# EAGLE board Distribution_Board (EAGLE 9.7.0)
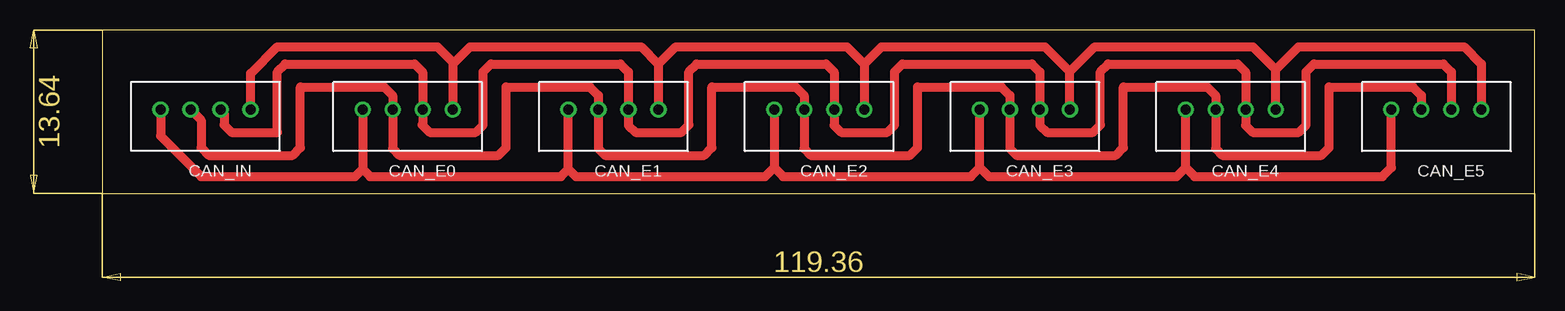
[diagram p0: board, top side]

Size 119.36 x 13.64 mm. Coordinates in mm from the lower left corner, seen from the top.
Outline: 0,0 119.36,0 119.36,13.64 0,13.64 0,0
Copper layers (1*16): Top / Bottom
Stack-up Default Layer Stack: Top User Defined 0.035mm / Dielectric-1 User Defined 1.5mm / Bottom User Defined 0.035mm
Design rules "default": minimum track width 6mil, minimum drill 0.35mm, track to track 6mil, track to pad 6mil, pad to pad 6mil, via to via 6mil, smd to smd 6mil, copper to edge 40mil, drill to drill 6mil, minimum pad ring 10mil, minimum via ring 8mil, stop-mask expansion 4mil, vias tented up to drill 0mil, thermal gap 10mil

## Footprints (pad centres in the part's own frame; a part is rotated, then mirrored left to right if it is on the bottom)
B4B-XH-A = drill 0.84: 1 0,0; 2 2.5,0; 3 5,0; 4 7.5,0

## Placement (x,y rotation side)
CAN_E0  3A/250V  [B4B-XH-A]  29.21,6.98 180 top
CAN_E1  3A/250V  [B4B-XH-A]  46.35,6.98 180 top
CAN_E2  3A/250V  [B4B-XH-A]  63.5,6.98 180 top
CAN_E3  3A/250V  [B4B-XH-A]  80.64,6.98 180 top
CAN_E4  3A/250V  [B4B-XH-A]  97.79,6.98 180 top
CAN_E5  3A/250V  [B4B-XH-A]  114.94,6.98 180 top
CAN_IN  3A/250V  [B4B-XH-A]  12.37,6.99 180 top

## Library data of the parts
CAN_E0 CAN_E1-CAN_E5 CAN_IN = Connector; CATEGORY: CONNECTOR; DSECRIPTION: 2.5mm pitch/disconnctable crimp style connector; MANUFACTURER: JST (XH connector); MPN: B4B-XH-A; OPERATING_TEMPERATURE: -25 C to 85 C; PART_STATUS: ACTIVE; ROHS_COMPLIANT: COMPLAINT; SERIES: B4B-XH-A; SUB_CATEGORY: Through hole; TYPE: TOP ENTRY

## Nets
N$1: CAN_E0.1 CAN_E1.1 CAN_E2.1 CAN_E3.1 CAN_E4.1 CAN_E5.1 CAN_IN.1
N$2: CAN_E0.2 CAN_E1.2 CAN_E2.2 CAN_E3.2 CAN_E4.2 CAN_E5.2 CAN_IN.2
N$3: CAN_E0.4 CAN_E1.4 CAN_E2.4 CAN_E3.4 CAN_E4.4 CAN_E5.4 CAN_IN.4
N$4: CAN_E0.3 CAN_E1.3 CAN_E2.3 CAN_E3.3 CAN_E4.3 CAN_E5.3 CAN_IN.3

## Tracks (layer width: path | path; a pad name or v marks a point on that pad's centre or on a via)
N$1
  Top 0.762: CAN_IN.1 12.37,10 14.61,12.24 27.94,12.24 29.21,10.97 | 29.21,10.97 CAN_E0.1 | 29.21,10.97 29.39,10.97 30.66,12.24 44.91,12.24 46.35,10.8 | 46.35,10.8 CAN_E1.1 | 63.5,10.8 CAN_E2.1 | CAN_E3.1 80.64,10.16 | CAN_E4.1 97.79,10.34 | CAN_E5.1 114.94,10.8 113.49,12.24 99.69,12.24 97.79,10.34 | 63.5,10.8 64.95,12.24 78.56,12.24 80.64,10.16 | 46.35,10.8 47.8,12.24 62.05,12.24 63.5,10.8 | 80.64,10.16 82.73,12.24 95.89,12.24 97.79,10.34
N$2
  Top 0.762: CAN_IN.2 10.16,6.7 10.16,5.72 10.79,5.08 14.61,5.08 14.61,10.16 15.24,10.8 26.04,10.8 26.71,10.12 CAN_E0.2 26.71,5.75 26.67,5.72 27.3,5.08 31.11,5.08 31.75,5.72 31.75,10.16 32.38,10.8 43.18,10.8 43.85,10.12 CAN_E1.2 43.85,5.67 44.45,5.08 48.26,5.08 48.9,5.72 48.9,10.16 49.53,10.8 60.33,10.8 61,10.12 CAN_E2.2 61,5.67 61.59,5.08 65.41,5.08 66.04,5.72 66.04,10.16 66.67,10.8 77.47,10.8 78.14,10.12 CAN_E3.2 78.14,5.67 78.74,5.08 82.55,5.08 83.19,5.72 83.19,10.16 83.82,10.8 94.61,10.8 95.29,10.12 CAN_E4.2 95.29,5.67 95.89,5.08 99.69,5.08 100.33,5.72 100.33,10.16 100.97,10.8 111.76,10.8 112.44,10.12 CAN_E5.2
N$3
  Top 0.762: CAN_IN.4 4.87,4.79 8.26,1.4 21.08,1.4 21.71,2.03 | CAN_E0.4 21.71,2.03 | 21.71,2.03 22.34,1.4 38.23,1.4 38.85,2.03 | 38.85,2.03 CAN_E1.4 | 38.85,2.03 39.48,1.4 55.24,1.4 56,2.15 | CAN_E2.4 56,2.15 | 56,2.15 56.76,1.4 72.39,1.4 73.14,2.15 | 73.14,2.15 CAN_E3.4 | 73.14,2.15 73.9,1.4 89.53,1.4 90.29,2.15 | 90.29,2.15 CAN_E4.4 | 90.29,2.15 91.05,1.4 106.68,1.4 107.44,2.15 CAN_E5.4
N$4
  Top 0.762: CAN_IN.3 8.26,6.1 8.26,3.81 8.89,3.17 15.88,3.17 16.51,3.81 16.51,8.89 23.5,8.89 24.21,8.17 CAN_E0.3 24.21,3.73 24.77,3.17 33.02,3.17 33.66,3.81 33.66,8.89 40.64,8.89 41.35,8.17 CAN_E1.3 41.35,3.73 41.91,3.17 50.16,3.17 50.8,3.81 50.8,8.89 57.78,8.89 58.5,8.17 CAN_E2.3 58.5,3.73 59.05,3.17 67.31,3.17 67.94,3.81 67.94,8.89 74.93,8.89 75.64,8.17 CAN_E3.3 75.64,3.73 76.2,3.17 84.45,3.17 85.09,3.81 85.09,8.89 92.08,8.89 92.79,8.17 CAN_E4.3 92.79,3.73 93.34,3.17 101.6,3.17 102.23,3.81 102.23,8.89 109.22,8.89 109.94,8.17 CAN_E5.3